# EAGLE board 1.8V Regler (EAGLE 7.1.0)
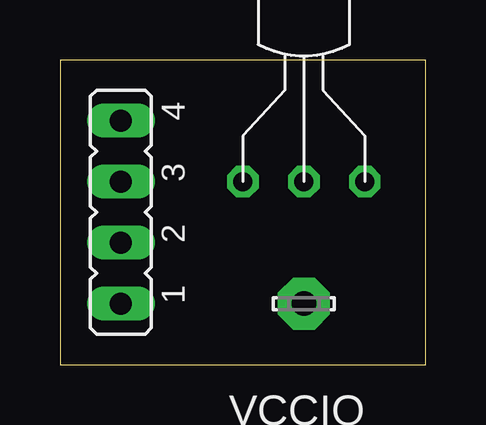
[diagram p0: board, top side]
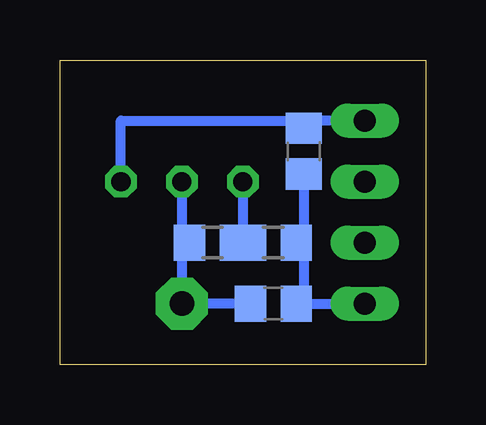
[diagram p1: board, bottom side, seen from below]

Size 15.24 x 12.7 mm. Coordinates in mm from the lower left corner, seen from the top.
Outline: 0,0.01 15.24,0 15.24,12.69 0,12.7 0,0.01
Copper layers (1*16): Top 0.035mm / dielectric 1.5mm / Bottom 0.035mm
Design rules "default": minimum track width 10mil, minimum drill 24mil, track to track 8mil, track to pad 8mil, pad to pad 8mil, via to via 8mil, smd to smd 8mil, copper to edge 40mil, drill to drill 8mil, minimum pad ring 10mil, minimum via ring 8mil, stop-mask expansion 4mil, vias tented up to drill 0mil, thermal gap 10mil

## Footprints (pad centres in the part's own frame; a part is rotated, then mirrored left to right if it is on the bottom)
C0805 = smd 1.3 x 1.5: 1 -0.95,0; 2 0.95,0
TO92TAPE = drill 0.8 octagon: P$1 0,2.54; P$2 0,-2.54; P$3 0,0
JP4 = drill 0.914 long: 1 -3.81,0; 2 -1.27,0; 3 1.27,0; 4 3.81,0
R0805 = smd 1.3 x 1.5: 1 -0.95,0; 2 0.95,0
LSP10 = drill 1.016 pad 2.159 octagon: MP 0,0

## Placement (x,y rotation side)
C1  100n  [C0805]  5.08,8.9 270 bottom
C2  1µ  [C0805]  6.35,2.55 0 bottom
IC1  LM317L  [TO92TAPE]  10.16,7.63 90 top
JP1  [JP4]  2.54,6.36 90 top
R1  240R  [R0805]  8.89,5.09 180 bottom
R2  100R  [R0805]  6.35,5.09 180 bottom
VCCIO  VCCIO  [LSP10]  10.16,2.55 0 top

## Library data of the parts
C1 C2 R1 R2 = rcl
IC1 = linear
JP1 = jumper
VCCIO = solpad

## Nets
1.8V: C2.1 IC1.P$3 R1.2 VCCIO.MP
5V: C1.1 IC1.P$2 JP1.4
GND: C1.2 C2.2 JP1.1 R2.1
N$1: IC1.P$1 R1.1 R2.2

## Tracks (layer width: path | path; a pad name or v marks a point on that pad's centre or on a via)
1.8V
  Bottom 0.406: IC1.P$3 10.16,5.09 | 10.16,5.09 VCCIO.MP C2.1 | R1.2 10.16,5.09
5V
  Bottom 0.406: JP1.4 5.08,10.17 | IC1.P$2 12.7,10.17 5.08,10.17 | 5.08,10.17 C1.1
GND
  Bottom 0.406: C1.2 5.08,5.09 | 5.08,5.09 5.08,2.55 | 5.08,2.55 JP1.1 | C2.2 5.08,2.55 | R2.1 5.08,5.09
N$1
  Bottom 0.406: IC1.P$1 7.62,5.09 R1.1 R2.2

## Text on the board
tDocu: 5V to 1.8V regulator | (solder directly to FTDI breakout board) | Can be built on a / solderable breadbord / with 2.54 mm spacing. | LM317L | Generate 1.8V for interfacing with / the CSR8645 chip over SPI interface. / Connect output to VCC of FTDI I/O logic. | 5V | RXL | TXL | GND | (RXL and TXL are only / used for mechanical stability) | 2017, AulaTV | AulaTV Bluetooth Audio Receiver